# EAGLE board 2-28-13 x1 (EAGLE 6.3), part 1 of 2
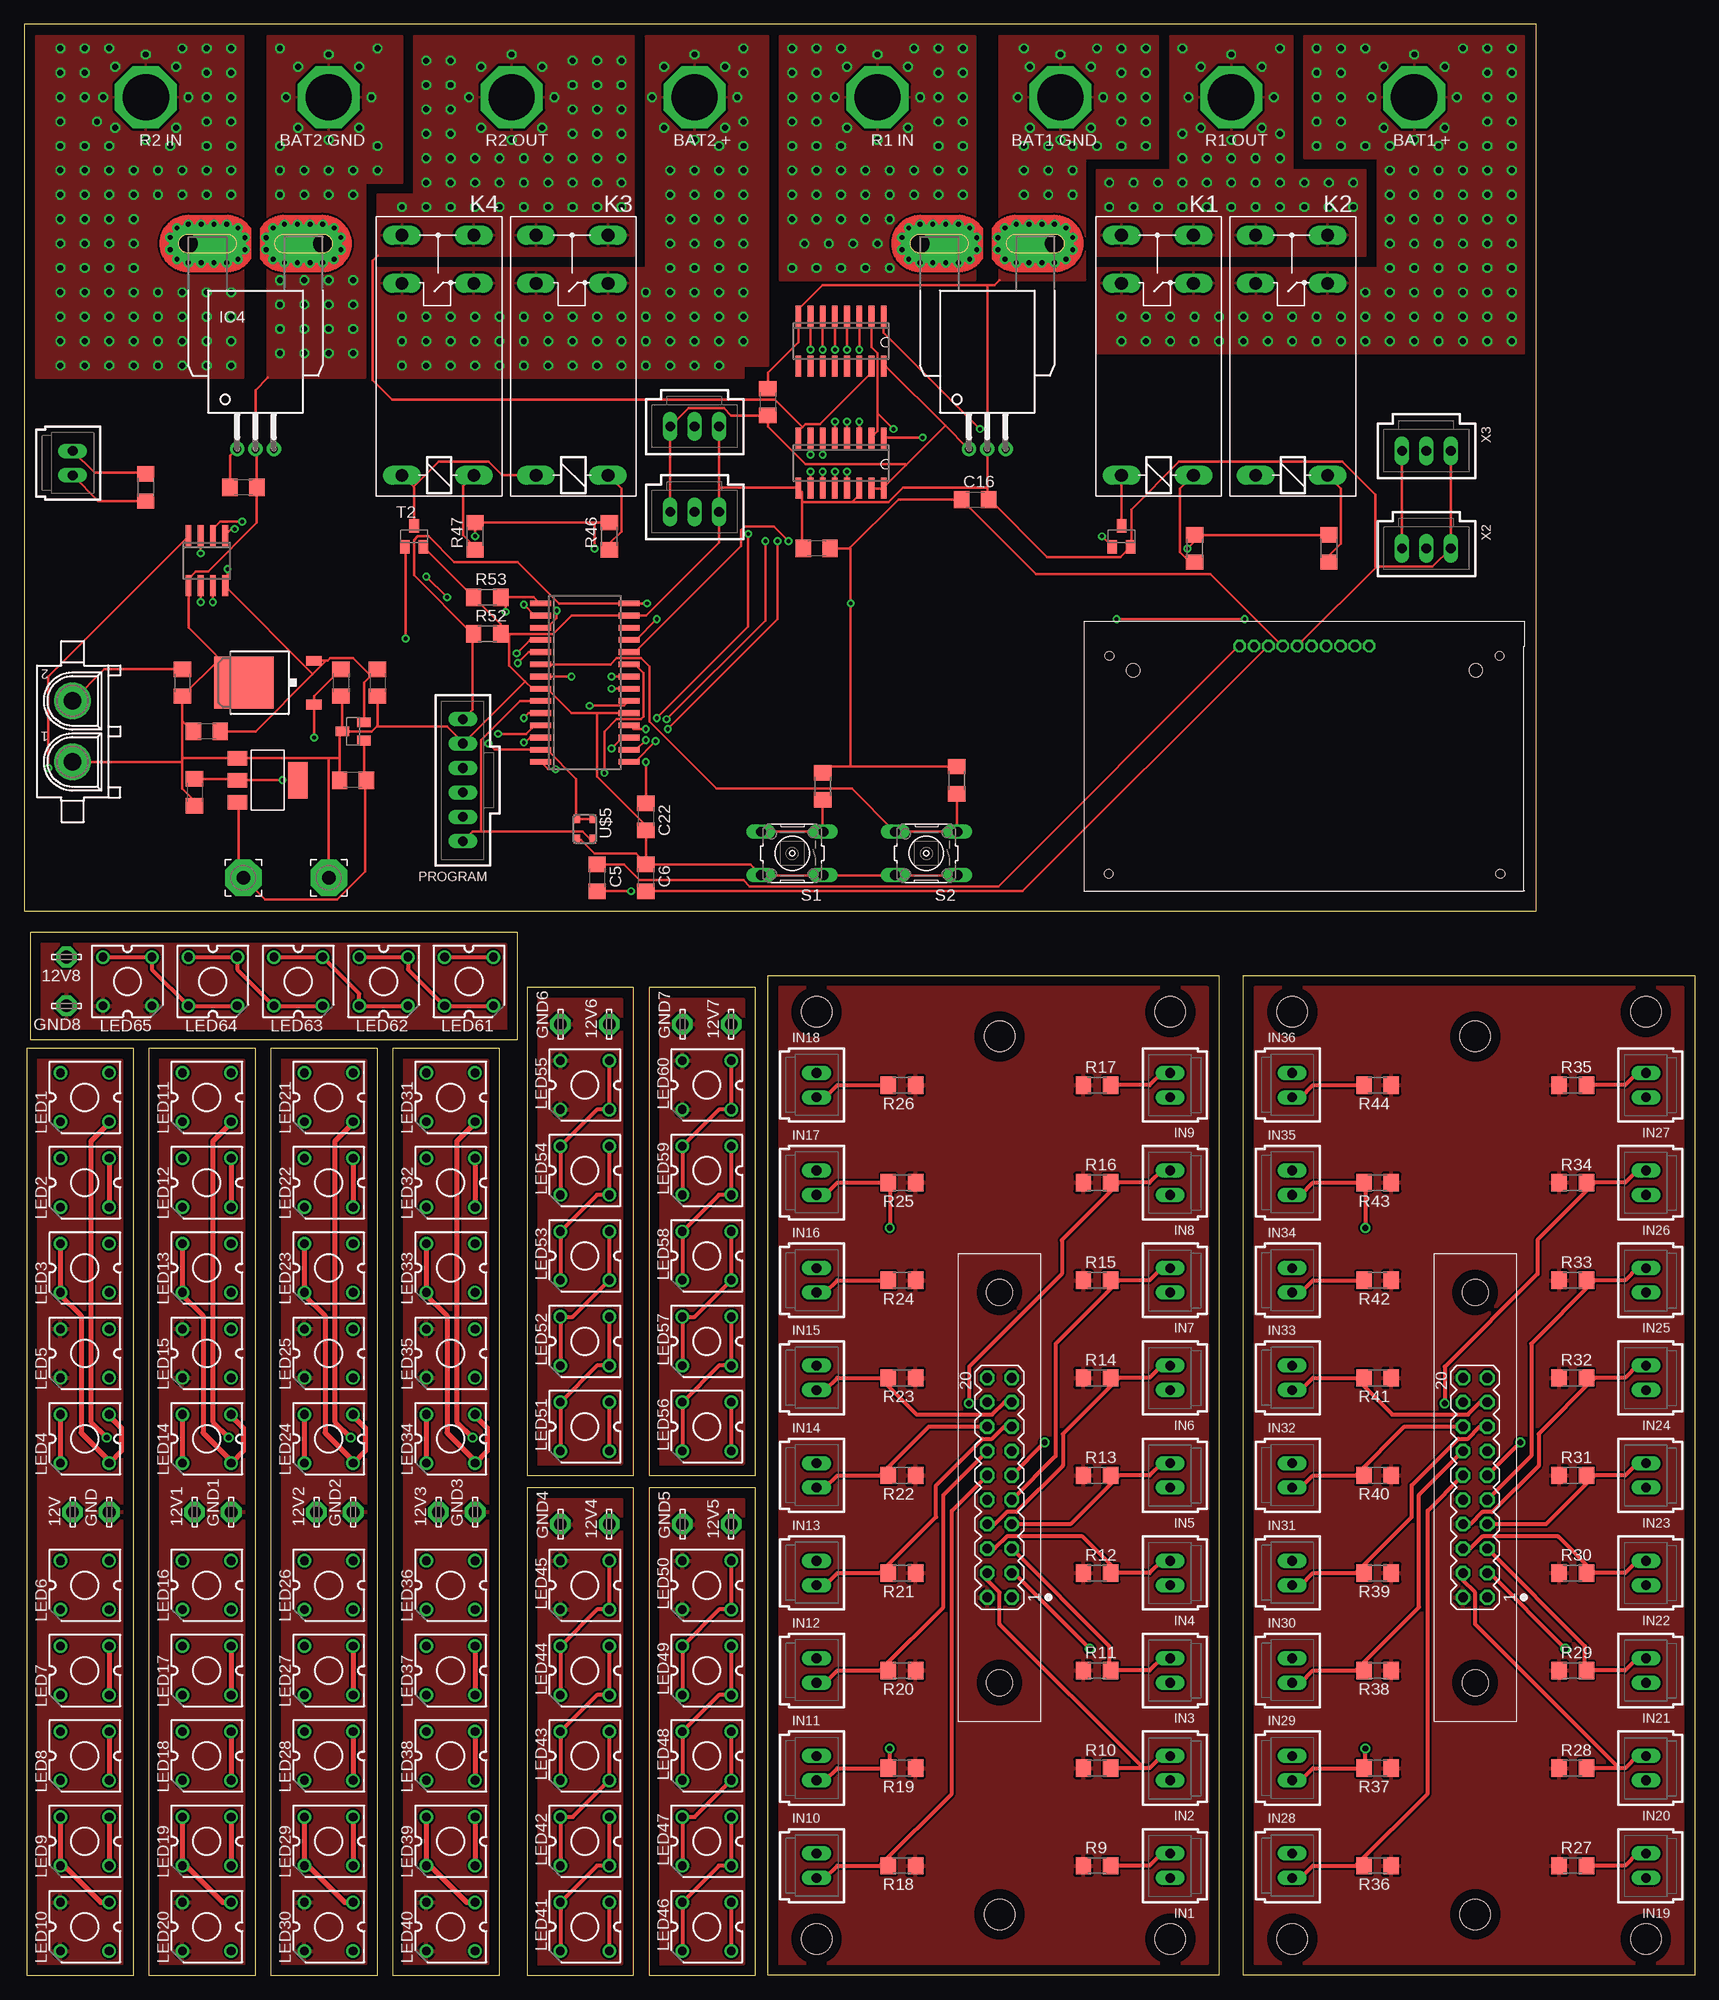
[diagram p0: board, top side]
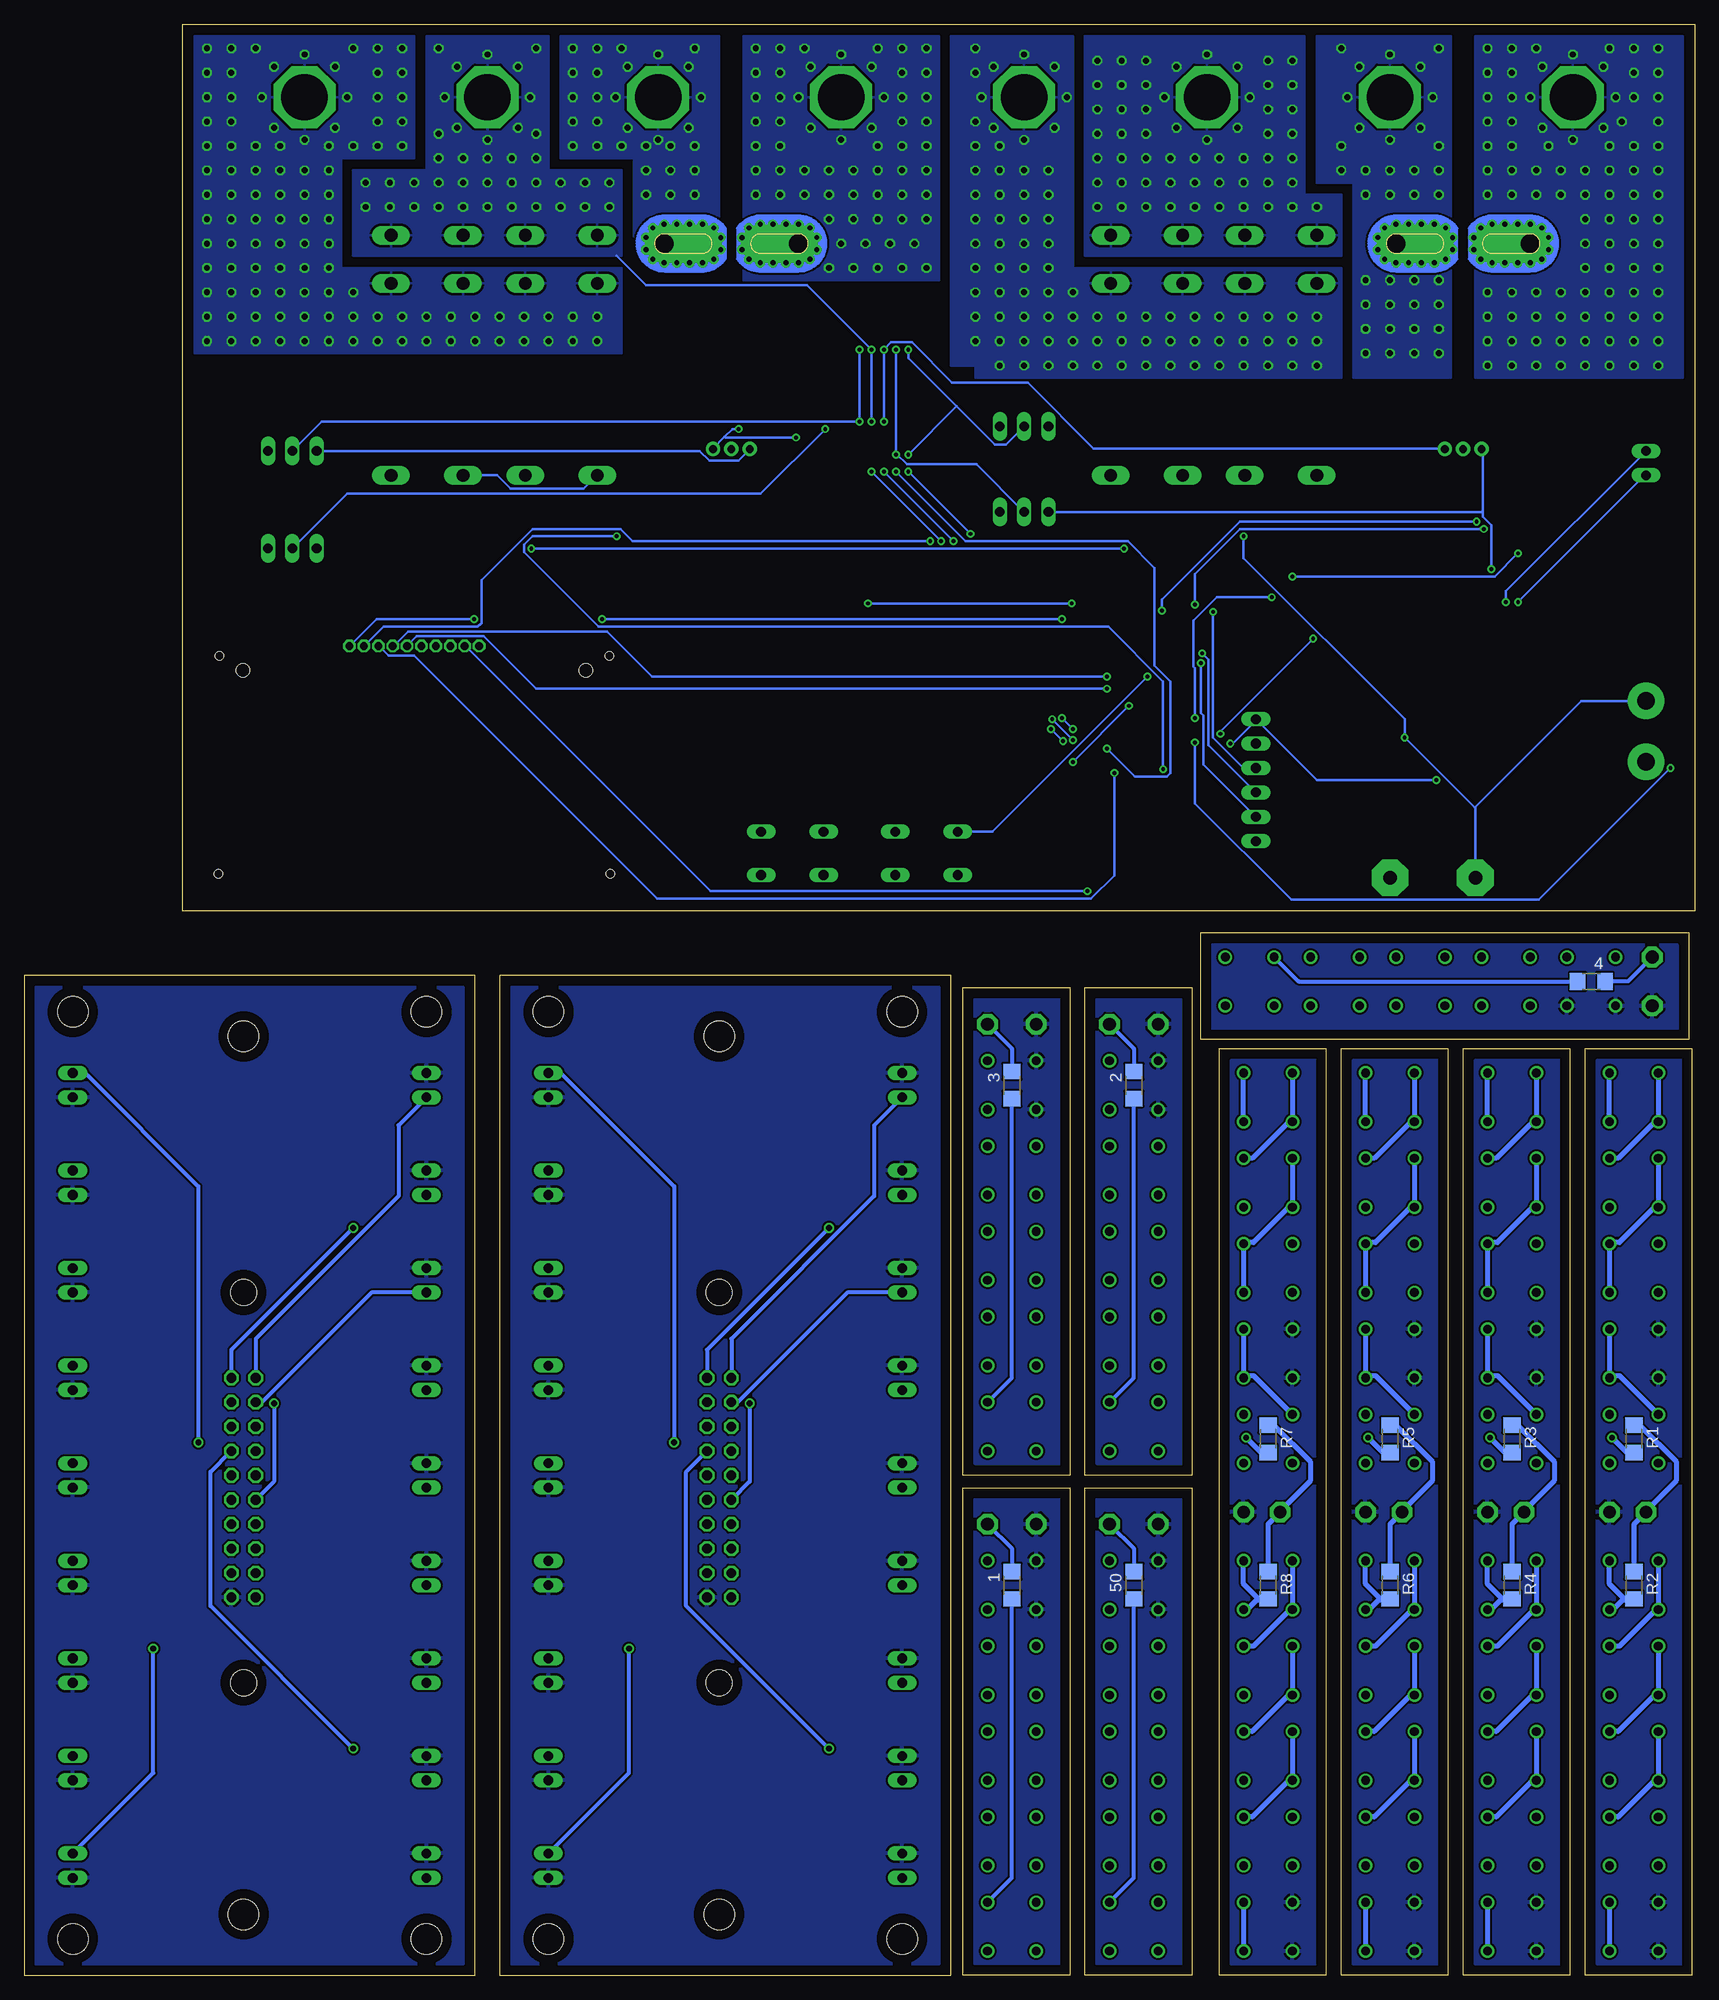
[diagram p1: board, bottom side, seen from below]

Size 173.97 x 203.2 mm. Coordinates in mm from the lower left corner, seen from the top.
Outline: 11.41,0 11.41,96.5 0.31,96.5 0.31,0 11.41,0
Outline: 24.11,0 24.11,96.5 13.01,96.5 13.01,0 24.11,0
Outline: 36.81,0 36.81,96.5 25.71,96.5 25.71,0 36.81,0
Outline: 49.51,0 49.51,96.5 38.41,96.5 38.41,0 49.51,0
Outline: 63.48,0 63.48,50.78 52.38,50.78 52.38,0 63.48,0
Outline: 76.18,0 76.18,50.78 65.08,50.78 65.08,0 76.18,0
Outline: 63.48,52.07 63.48,102.85 52.38,102.85 52.38,52.07 63.48,52.07
Outline: 76.18,52.07 76.18,102.85 65.08,102.85 65.08,52.07 76.18,52.07
Outline: 51.41,108.58 0.64,108.58 0.64,97.48 51.41,97.48 51.41,108.58
Outline: 124.44,104.14 124.44,0 77.45,0 77.45,104.14 124.44,104.14
Outline: 173.97,104.14 173.97,0 126.98,0 126.98,104.14 173.97,104.14
Outline: 157.46,203.2 0,203.2 0,110.82 157.46,110.82 157.46,203.2
Copper layers (1*16): Top 0.035mm / dielectric 1.5mm / Bottom 0.035mm
Design rules "default": minimum track width 10mil, minimum drill 24mil, track to track 8mil, track to pad 8mil, pad to pad 8mil, via to via 8mil, smd to smd 8mil, copper to edge 40mil, drill to drill 8mil, minimum pad ring 10mil, minimum via ring 8mil, stop-mask expansion 4mil, vias tented up to drill 0mil, thermal gap 10mil
Holes 3.17 mm at 119.36,100.33 82.53,100.33 119.36,3.81 82.53,3.81 101.58,6.35 101.58,97.79 168.89,100.33 132.06,100.33 168.89,3.81 132.06,3.81 151.11,6.35 151.11,97.79

## Footprints (pad centres in the part's own frame; a part is rotated, then mirrored left to right if it is on the bottom)
R1206 = smd 1.6 x 1.803: 1 -1.422,0; 2 1.422,0
LSP13 = drill 1.321 pad 2.159 octagon: MP 0,0
SOLDERPAD = drill 4.826 pad 6.452 octagon: P$1 0,0
C1206 = smd 1.6 x 1.8: 1 -1.4,0; 2 1.4,0
TO252 = smd 1 x 1.6: 1 -2.28,-4.8; 2 2.28,-4.8 | smd 5.4 x 6.2: 3 0,2.5
CB-PFF = drill 0.8 pad 1.5: 1 -1.91,-21.4; 2 0,-21.4; 3 1.91,-21.4 | drill 2 pad 4 offset: IP+ 7,0; IP- -7,0 | drill 0.5 pad 0.9: IP+@2 8.89,0.635; IP+@3 8.89,-0.635; IP+@4 8.175,-1.625; IP+@5 7,-2; IP+@6 5.675,-2; IP+@7 4.35,-2; IP+@8 3,-2; IP+@9 1.825,-1.625; IP+@10 1.1,-0.625; IP+@11 1.1,0.625; IP+@12 1.825,1.625; IP+@13 3,2; IP+@14 4.35,2; IP+@15 5.675,2; IP+@16 7,2; IP+@17 8.175,1.625; IP-@2 -8.89,0.635; IP-@3 -8.89,-0.635; IP-@4 -8.175,-1.625; IP-@5 -7,-2; IP-@6 -5.675,-2; IP-@7 -4.325,-2; IP-@8 -3,-2; IP-@9 -1.825,-1.625; IP-@10 -1.1,-0.625; IP-@11 -1.1,0.625; IP-@12 -1.825,1.625; IP-@13 -3,2; IP-@14 -4.325,2; IP-@15 -5.675,2; IP-@16 -7,2; IP-@17 -8.175,1.625
SOT223 = smd 1.499 x 2.007: 1 -2.261,-3.15; 2 0.025,-3.15; 3 2.311,-3.15 | smd 3.81 x 2.007: 4 0,3.15
70543-02 = drill 1.016 long: 1 -1.27,0; 2 1.27,0
350428-1 = drill 1.8 pad 3.81: 1 -3.175,0; 2 3.175,0
G2REA = drill 1.321 long: 1 -2.54,-3.683; 2 -2.54,3.81; P 17.45,-3.683; P@ 17.45,3.81; S 22.454,-3.683; S@ 22.454,3.81
CP41B = drill 0.9 pad 1.27: 1 -2.54,2.54; 2 -2.54,-2.54; 3 2.54,-2.54; 4 2.54,2.54
3,81/1,4 = drill 1.397 pad 3.81 octagon: 1 0,0
70543-06 = drill 1.016 long: 1 -6.35,0; 2 -3.81,0; 3 -1.27,0; 4 1.27,0; 5 3.81,0; 6 6.35,0
B3F-10XX = drill 1.016 long: 1 -3.251,2.261; 2 3.251,2.261; 3 -3.251,-2.261; 4 3.251,-2.261
SOT23 = smd 1 x 1.4: 1 -0.95,-1.1; 2 0.95,-1.1; 3 0,1.1
MA10-2 = drill 1.016 octagon: 1 -11.43,-1.27; 2 -11.43,1.27; 3 -8.89,-1.27; 4 -8.89,1.27; 5 -6.35,-1.27; 6 -6.35,1.27; 7 -3.81,-1.27; 8 -3.81,1.27; 9 -1.27,-1.27; 10 -1.27,1.27; 11 1.27,-1.27; 12 1.27,1.27; 13 3.81,-1.27; 14 3.81,1.27; 15 6.35,-1.27; 16 6.35,1.27; 17 8.89,-1.27; 18 8.89,1.27; 19 11.43,-1.27; 20 11.43,1.27 | hole 2.692: -20.32,0; 20.32,0
SO16 = smd 0.6 x 2.2: 1 -4.445,-2.6; 2 -3.175,-2.6; 3 -1.905,-2.6; 4 -0.635,-2.6; 5 0.635,-2.6; 6 1.905,-2.6; 7 3.175,-2.6; 8 4.445,-2.6; 9 4.445,2.6; 10 3.175,2.6; 11 1.905,2.6; 12 0.635,2.6; 13 -0.635,2.6; 14 -1.905,2.6; 15 -3.175,2.6; 16 -4.445,2.6
SO28W = smd 0.6 x 2.2: 1 -8.255,-4.6; 2 -6.985,-4.6; 3 -5.715,-4.6; 4 -4.445,-4.6; 5 -3.175,-4.6; 6 -1.905,-4.6; 7 -0.635,-4.6; 8 0.635,-4.6; 9 1.905,-4.6; 10 3.175,-4.6; 11 4.445,-4.6; 12 5.715,-4.6; 13 6.985,-4.6; 14 8.255,-4.6; 15 8.255,4.6; 16 6.985,4.6; 17 5.715,4.6; 18 4.445,4.6; 19 3.175,4.6; 20 1.905,4.6; 21 0.635,4.6; 22 -0.635,4.6; 23 -1.905,4.6; 24 -3.175,4.6; 25 -4.445,4.6; 26 -5.715,4.6; 27 -6.985,4.6; 28 -8.255,4.6
ASE = smd 0.9 x 0.65: 1 -1.05,-0.825; 2 1.05,-0.825; 3 1.05,0.825; 4 -1.05,0.825
LCD_SCREEN = drill 0.8 octagon: 1 -6.75,0; 2 -5.25,0; 3 -3.75,0; 4 -2.25,0; 5 -0.75,0; 6 0.75,0; 7 2.25,0; 8 3.75,0; 9 5.25,0; 10 6.75,0 | hole 0.9: 20.3,1; -20.3,1; 20.4,23.7; -20.4,23.7 | hole 1.4: 17.85,2.55; -17.85,2.55
SO-08 = smd 0.6 x 2.2: 1 -1.905,-2.6; 2 -0.635,-2.6; 3 0.635,-2.6; 4 1.905,-2.6; 5 1.905,2.6; 6 0.635,2.6; 7 -0.635,2.6; 8 -1.905,2.6
70543-03 = drill 1.016 long: 1 -2.54,0; 2 0,0; 3 2.54,0

## Placement (x,y rotation side)
1  RESISTORSMD1206  [R1206]  71.1,40.64 270 bottom
2  RESISTORSMD1206  [R1206]  58.4,92.71 270 bottom
3  RESISTORSMD1206  [R1206]  71.1,92.71 270 bottom
4  RESISTORSMD1206  [R1206]  10.78,103.5 180 bottom
12V  LSP13  [LSP13]  5.06,48.26 90 top
12V1  LSP13  [LSP13]  17.76,48.26 90 top
12V2  LSP13  [LSP13]  30.46,48.26 90 top
12V3  LSP13  [LSP13]  43.16,48.26 90 top
12V4  LSP13  [LSP13]  60.94,46.99 90 top
12V5  LSP13  [LSP13]  73.64,46.99 90 top
12V6  LSP13  [LSP13]  60.94,99.06 90 top
12V7  LSP13  [LSP13]  73.64,99.06 90 top
12V8  LSP13  [LSP13]  4.43,106.05 180 top
50  RESISTORSMD1206  [R1206]  58.4,40.64 270 bottom
BAT+_1  BAT1 +  [SOLDERPAD]  144.76,195.58 180 top
BAT+_2  BAT2 +  [SOLDERPAD]  69.83,195.58 180 top
BAT-_1  BAT1 GND  [SOLDERPAD]  107.93,195.58 180 top
BAT-_2  BAT2 GND  [SOLDERPAD]  31.73,195.58 180 top
C1  .3uF  [C1206]  34.27,124.46 180 top
C2  1uF  [C1206]  33,134.62 270 top
C3  1uF  [C1206]  22.84,154.94 180 top
C4  1uF  [C1206]  36.81,134.62 270 top
C5  1uF  [C1206]  59.67,114.3 270 top
C6  1uF  [C1206]  64.75,114.3 270 top
C7  1uF  [C1206]  19.03,129.54 180 top
C8  1uF  [C1206]  16.49,134.62 270 top
C9  1uF  [C1206]  17.76,123.19 270 top
C10  1uF  [C1206]  77.45,163.83 270 top
C16  .1uF  [C1206]  99.04,153.67 0 top
C22  1uF  [C1206]  64.75,120.65 270 top
C48  .1uF  [C1206]  82.53,148.59 180 top
GND  LSP13  [LSP13]  8.87,48.26 90 top
GND1  LSP13  [LSP13]  21.57,48.26 90 top
GND2  LSP13  [LSP13]  34.27,48.26 90 top
GND3  LSP13  [LSP13]  46.97,48.26 90 top
GND4  LSP13  [LSP13]  55.86,46.99 90 top
GND5  LSP13  [LSP13]  68.56,46.99 90 top
GND6  LSP13  [LSP13]  55.86,99.06 90 top
GND7  LSP13  [LSP13]  68.56,99.06 90 top
GND8  LSP13  [LSP13]  4.43,100.97 180 top
IC1  7805DT  [TO252]  25.38,134.62 90 top
IC2  ACS758ECB-200B-PFF-T  [CB-PFF]  100.31,180.34 0 top
IC3  REG1117  [SOT223]  25.38,124.46 270 top
IC4  ACS758ECB-200B-PFF-T  [CB-PFF]  24.11,180.34 0 top
IN1  C-GRID-02-70543  [70543-02]  119.36,11.43 90 top
IN2  C-GRID-02-70543  [70543-02]  119.36,21.59 90 top
IN3  C-GRID-02-70543  [70543-02]  119.36,31.75 90 top
IN4  C-GRID-02-70543  [70543-02]  119.36,41.91 90 top
IN5  C-GRID-02-70543  [70543-02]  119.36,52.07 90 top
IN6  C-GRID-02-70543  [70543-02]  119.36,62.23 90 top
IN7  C-GRID-02-70543  [70543-02]  119.36,72.39 90 top
IN8  C-GRID-02-70543  [70543-02]  119.36,82.55 90 top
IN9  C-GRID-02-70543  [70543-02]  119.36,92.71 90 top
IN10  C-GRID-02-70543  [70543-02]  82.53,11.43 270 top
IN11  C-GRID-02-70543  [70543-02]  82.53,21.59 270 top
IN12  C-GRID-02-70543  [70543-02]  82.53,31.75 270 top
IN13  C-GRID-02-70543  [70543-02]  82.53,41.91 270 top
IN14  C-GRID-02-70543  [70543-02]  82.53,52.07 270 top
IN15  C-GRID-02-70543  [70543-02]  82.53,62.23 270 top
IN16  C-GRID-02-70543  [70543-02]  82.53,72.39 270 top
IN17  C-GRID-02-70543  [70543-02]  82.53,82.55 270 top
IN18  C-GRID-02-70543  [70543-02]  82.53,92.71 270 top
IN19  C-GRID-02-70543  [70543-02]  168.89,11.43 90 top
IN20  C-GRID-02-70543  [70543-02]  168.89,21.59 90 top
IN21  C-GRID-02-70543  [70543-02]  168.89,31.75 90 top
IN22  C-GRID-02-70543  [70543-02]  168.89,41.91 90 top
IN23  C-GRID-02-70543  [70543-02]  168.89,52.07 90 top
IN24  C-GRID-02-70543  [70543-02]  168.89,62.23 90 top
IN25  C-GRID-02-70543  [70543-02]  168.89,72.39 90 top
IN26  C-GRID-02-70543  [70543-02]  168.89,82.55 90 top
IN27  C-GRID-02-70543  [70543-02]  168.89,92.71 90 top
IN28  C-GRID-02-70543  [70543-02]  132.06,11.43 270 top
IN29  C-GRID-02-70543  [70543-02]  132.06,21.59 270 top
IN30  C-GRID-02-70543  [70543-02]  132.06,31.75 270 top
IN31  C-GRID-02-70543  [70543-02]  132.06,41.91 270 top
IN32  C-GRID-02-70543  [70543-02]  132.06,52.07 270 top
IN33  C-GRID-02-70543  [70543-02]  132.06,62.23 270 top
IN34  C-GRID-02-70543  [70543-02]  132.06,72.39 270 top
IN35  C-GRID-02-70543  [70543-02]  132.06,82.55 270 top
IN36  C-GRID-02-70543  [70543-02]  132.06,92.71 270 top
J1  350428-1  [350428-1]  5.06,129.54 90 top
K1  G2REA  [G2REA]  118.09,158.75 90 top
K2  G2REA  [G2REA]  132.06,158.75 90 top
K3  G2REA  [G2REA]  57.13,158.75 90 top
K4  G2REA  [G2REA]  43.16,158.75 90 top
LED1  LED1  [CP41B]  6.33,91.44 90 top
LED2  LED2  [CP41B]  6.33,82.55 90 top
LED3  LED3  [CP41B]  6.33,73.66 90 top
LED4  LED4  [CP41B]  6.33,55.88 90 top
LED5  LED5  [CP41B]  6.33,64.77 90 top
LED6  LED6  [CP41B]  6.33,40.64 90 top
LED7  LED7  [CP41B]  6.33,31.75 90 top
LED8  LED8  [CP41B]  6.33,22.86 90 top
LED9  LED9  [CP41B]  6.33,13.97 90 top
LED10  LED10  [CP41B]  6.33,5.08 90 top
LED11  LED1  [CP41B]  19.03,91.44 90 top
LED12  LED2  [CP41B]  19.03,82.55 90 top
LED13  LED3  [CP41B]  19.03,73.66 90 top
LED14  LED4  [CP41B]  19.03,55.88 90 top
LED15  LED5  [CP41B]  19.03,64.77 90 top
LED16  LED6  [CP41B]  19.03,40.64 90 top
LED17  LED7  [CP41B]  19.03,31.75 90 top
LED18  LED8  [CP41B]  19.03,22.86 90 top
LED19  LED9  [CP41B]  19.03,13.97 90 top
LED20  LED10  [CP41B]  19.03,5.08 90 top
LED21  LED1  [CP41B]  31.73,91.44 90 top
LED22  LED2  [CP41B]  31.73,82.55 90 top
LED23  LED3  [CP41B]  31.73,73.66 90 top
LED24  LED4  [CP41B]  31.73,55.88 90 top
LED25  LED5  [CP41B]  31.73,64.77 90 top
LED26  LED6  [CP41B]  31.73,40.64 90 top
LED27  LED7  [CP41B]  31.73,31.75 90 top
LED28  LED8  [CP41B]  31.73,22.86 90 top
LED29  LED9  [CP41B]  31.73,13.97 90 top
LED30  LED10  [CP41B]  31.73,5.08 90 top
LED31  LED1  [CP41B]  44.43,91.44 90 top
LED32  LED2  [CP41B]  44.43,82.55 90 top
LED33  LED3  [CP41B]  44.43,73.66 90 top
LED34  LED4  [CP41B]  44.43,55.88 90 top
LED35  LED5  [CP41B]  44.43,64.77 90 top
LED36  LED6  [CP41B]  44.43,40.64 90 top
LED37  LED7  [CP41B]  44.43,31.75 90 top
LED38  LED8  [CP41B]  44.43,22.86 90 top
LED39  LED9  [CP41B]  44.43,13.97 90 top
LED40  LED10  [CP41B]  44.43,5.08 90 top
LED41  LED1  [CP41B]  58.4,5.08 90 top
LED42  LED2  [CP41B]  58.4,13.97 90 top
LED43  LED3  [CP41B]  58.4,22.86 90 top
LED44  LED4  [CP41B]  58.4,31.75 90 top
LED45  LED5  [CP41B]  58.4,40.64 90 top
LED46  LED1  [CP41B]  71.1,5.08 90 top
LED47  LED2  [CP41B]  71.1,13.97 90 top
LED48  LED3  [CP41B]  71.1,22.86 90 top
LED49  LED4  [CP41B]  71.1,31.75 90 top
LED50  LED5  [CP41B]  71.1,40.64 90 top
LED51  LED1  [CP41B]  58.4,57.15 90 top
LED52  LED2  [CP41B]  58.4,66.04 90 top
LED53  LED3  [CP41B]  58.4,74.93 90 top
LED54  LED4  [CP41B]  58.4,83.82 90 top
LED55  LED5  [CP41B]  58.4,92.71 90 top
LED56  LED1  [CP41B]  71.1,57.15 90 top
LED57  LED2  [CP41B]  71.1,66.04 90 top
LED58  LED3  [CP41B]  71.1,74.93 90 top
LED59  LED4  [CP41B]  71.1,83.82 90 top
LED60  LED5  [CP41B]  71.1,92.71 90 top
LED61  LED1  [CP41B]  46.33,103.5 180 top
LED62  LED2  [CP41B]  37.45,103.5 180 top
LED63  LED3  [CP41B]  28.55,103.5 180 top
LED64  LED4  [CP41B]  19.66,103.5 180 top
LED65  LED5  [CP41B]  10.78,103.5 180 top
PAD_12V  12v  [3,81/1,4]  22.84,114.3 0 top
PAD_GND  gnd  [3,81/1,4]  31.73,114.3 0 top
PROGRAM  C-GRID-06-70543  [70543-06]  45.7,124.46 90 top
R1  50  [R1206]  6.33,55.88 270 bottom
R2  50  [R1206]  6.33,40.64 270 bottom
R3  50  [R1206]  19.03,55.88 270 bottom
R4  50  [R1206]  19.03,40.64 270 bottom
R5  50  [R1206]  31.73,55.88 270 bottom
R6  50  [R1206]  31.73,40.64 270 bottom
R7  50  [R1206]  44.43,55.88 270 bottom
R8  50  [R1206]  44.43,40.64 270 bottom
R9  1K  [R1206]  111.74,11.43 0 top
R10  1K  [R1206]  111.74,21.59 0 top
R11  1K  [R1206]  111.74,31.75 0 top
R12  1K  [R1206]  111.74,41.91 0 top
R13  1K  [R1206]  111.74,52.07 0 top
R14  1K  [R1206]  111.74,62.23 0 top
R15  1K  [R1206]  111.74,72.39 0 top
R16  1K  [R1206]  111.74,82.55 0 top
R17  1K  [R1206]  111.74,92.71 0 top
R18  1K  [R1206]  91.42,11.43 180 top
R19  1K  [R1206]  91.42,21.59 180 top
R20  1K  [R1206]  91.42,31.75 180 top
R21  1K  [R1206]  91.42,41.91 180 top
R22  1K  [R1206]  91.42,52.07 180 top
R23  1K  [R1206]  91.42,62.23 180 top
R24  1K  [R1206]  91.42,72.39 180 top
R25  1K  [R1206]  91.42,82.55 180 top
R26  1K  [R1206]  91.42,92.71 180 top
R27  1K  [R1206]  161.27,11.43 0 top
R28  1K  [R1206]  161.27,21.59 0 top
R29  1K  [R1206]  161.27,31.75 0 top
R30  1K  [R1206]  161.27,41.91 0 top
R31  1K  [R1206]  161.27,52.07 0 top
R32  1K  [R1206]  161.27,62.23 0 top
R33  1K  [R1206]  161.27,72.39 0 top
R34  1K  [R1206]  161.27,82.55 0 top
R35  1K  [R1206]  161.27,92.71 0 top
R36  1K  [R1206]  140.95,11.43 180 top
R37  1K  [R1206]  140.95,21.59 180 top
R38  1K  [R1206]  140.95,31.75 180 top
R39  1K  [R1206]  140.95,41.91 180 top
R40  1K  [R1206]  140.95,52.07 180 top
R41  1K  [R1206]  140.95,62.23 180 top
R42  1K  [R1206]  140.95,72.39 180 top
R43  1K  [R1206]  140.95,82.55 180 top
R44  1K  [R1206]  140.95,92.71 180 top
R45  1K  [R1206]  135.87,148.59 90 top
R46  1K  [R1206]  60.94,149.86 90 top
R47  1K  [R1206]  46.97,149.86 90 top
R48  1K  [R1206]  83.17,123.83 90 top
R49  1K  [R1206]  97.14,124.46 270 top
R50  120  [R1206]  12.68,154.94 90 top
R52  10k\  [R1206]  48.24,139.7 0 top
R53  470  [R1206]  48.24,143.51 0 top
R169  1K  [R1206]  121.9,148.59 90 top
R_IN_1  R1 IN  [SOLDERPAD]  88.88,195.58 180 top
R_IN_2  R2 IN  [SOLDERPAD]  12.68,195.58 180 top
R_OUT_1  R1 OUT  [SOLDERPAD]  125.71,195.58 180 top
R_OUT_2  R2 OUT  [SOLDERPAD]  50.78,195.58 180 top
S1  [B3F-10XX]  79.99,116.84 180 top
S2  [B3F-10XX]  93.96,116.84 180 top
T1  PMV56XN  [SOT23]  114.28,149.86 0 top
T2  PMV56XN  [SOT23]  40.62,149.86 0 top
U$1  AMP_LATCH-20  [MA10-2]  101.58,50.8 90 top
U$2  AMP_LATCH-20  [MA10-2]  151.11,50.8 90 top
U$3  MCP-3008  [SO16]  85.07,157.48 180 top
U$4  PIC24HJ128GP-202  [SO28W]  58.4,134.62 270 top
U$5  ASE  [ASE]  58.4,119.38 270 top
U$6  LCD_SCREEN  [LCD_SCREEN]  133.33,138.43 180 top
U$7  MAX6105  [SOT23]  34.27,129.54 90 top
U$8  SP720APP  [SO16]  85.07,170.18 180 top
U$9  MAX3440E  [SO-08]  19.03,147.32 180 top
X1  BAT2 TEMP 1  [70543-03]  69.83,152.4 180 top
X2  BAT1 TEMP1  [70543-03]  146.03,148.59 180 top
X3  BAT1 TEMP2  [70543-03]  146.03,158.75 180 top
X4  BAT2 TEMP2  [70543-03]  69.83,161.29 180 top
X5  rs-485  [70543-02]  5.06,157.48 270 top

## Library data of the parts
1-4 50 BAT+_1 BAT+_2 BAT-_1 BAT-_2 R_IN_1 R_IN_2 R_OUT_1 R_OUT_2 U$3 U$7 U$8 = SolarJackets_Common
12V 12V1-12V8 GND GND1-GND8 = solpad
C1-C10 C16 C22 C48 R1-R50 R52 R53 R169 = rcl
IC1 = linear
IC2 IC4 = allegro; MPN: ACS758ECB-200B-PFF-T; OC_FARNELL: 1718993; OC_NEWARK: 04R7127
IC3 = burr-brown; MPN: REG1117; OC_FARNELL: 1097566; OC_NEWARK: 14P6981
IN1-IN36 PROGRAM X1-X5 = con-molex; OC_FARNELL: unknown; OC_NEWARK: unknown
J1 = con-amp
K1-K4 = relay; OC_FARNELL: unknown; OC_NEWARK: unknown
LED1-LED65 = led
PAD_12V PAD_GND = wirepad
S1 S2 = switch-omron; MPN: B3F-1000; OC_FARNELL: 176432; OC_NEWARK: 36M3542
T1 T2 = SolarJacketsADC; PART_NUM: PMV56XN,215
U$1 U$2 = SolarJackets_Common; PART_NUM: 5499160-1
U$4 = LTC6803
U$5 = crystal; OC_FARNELL: unknown; OC_NEWARK: unknown
U$6 = LCD_SCREEN
U$9 = SolarJackets

## Nets
3.3V: IN1.1 IN2.1 IN3.1 IN4.1 IN5.1 IN6.1 IN7.1 IN8.1 IN9.1 IN10.1 IN11.1 IN12.1 IN13.1 IN14.1 IN15.1 IN16.1 IN17.1 IN18.1 U$1.1
3.3V1: IN19.1 IN20.1 IN21.1 IN22.1 IN23.1 IN24.1 IN25.1 IN26.1 IN27.1 IN28.1 IN29.1 IN30.1 IN31.1 IN32.1 IN33.1 IN34.1 IN35.1 IN36.1 U$2.1
+3V3: C9.1 C16.1 C48.1 IC3.2 PROGRAM.6 R48.2 R49.1 R52.1 U$4.13 U$4.28 U$5.1 U$5.4 U$6.7
+5V: C3.2 C4.1 C7.1 C10.2 IC1.2 IC2.1 IC4.1 U$3.15 U$3.16 U$7.2 U$8.16 U$9.8 X1.3 X2.3 X3.3 X4.3
+12V: C1.1 C2.1 C8.1 IC1.1 IC3.3 J1.2 PAD_12V.1 R45.2 R46.2 R47.2 R169.2 U$7.1
CH0: IC2.3 U$3.1 U$8.1
CH1: U$3.2 U$8.2 X2.2
CH2: U$3.3 U$8.3 X3.2
CH3: K1.S K1.S@ K2.S K2.S@ R_OUT_1.P$1 U$3.4 U$8.4
CH4: IC4.3 U$3.5 U$8.5
CH5: U$3.6 U$8.6 X1.2
CH6: U$3.7 U$8.7 X4.2
CH7: K3.S K3.S@ K4.S K4.S@ R_OUT_2.P$1 U$3.8 U$8.15
GND: GND.MP LED5.1 LED5.4 LED10.1 LED10.4
GND1: GND1.MP LED15.1 LED15.4 LED20.1 LED20.4
GND2: GND2.MP LED25.1 LED25.4 LED30.1 LED30.4
GND3: GND3.MP LED35.1 LED35.4 LED40.1 LED40.4
GND4: GND4.MP LED45.1 LED45.4
GND5: GND5.MP LED50.1 LED50.4
GND6: GND6.MP LED55.1 LED55.4
GND7: GND7.MP LED60.1 LED60.4
GND8: GND8.MP LED65.1 LED65.4
GND9: R9.1 R10.1 R11.1 R12.1 R13.1 R14.1 R15.1 R16.1 R17.1 R18.1 R19.1 R20.1 R21.1 R22.1 R23.1 R24.1 R25.1 R26.1 U$1.2
GND10: R27.1 R28.1 R29.1 R30.1 R31.1 R32.1 R33.1 R34.1 R35.1 R36.1 R37.1 R38.1 R39.1 R40.1 R41.1 R42.1 R43.1 R44.1 U$2.2
GND11: BAT-_1.P$1 BAT-_2.P$1 C1.2 C2.2 C3.1 C4.2 C6.1 C7.2 C8.2 C9.2 C10.1 C16.2 C22.2 C48.2 IC1.3 IC2.2 IC2.IP+ IC2.IP+@2 IC2.IP+@3 IC2.IP+@4 IC2.IP+@5 IC2.IP+@6 IC2.IP+@7 IC2.IP+@8 IC2.IP+@9 IC2.IP+@10 IC2.IP+@11 IC2.IP+@12 IC2.IP+@13 IC2.IP+@14 IC2.IP+@15 IC2.IP+@16 IC2.IP+@17 IC3.1 IC4.2 IC4.IP+ IC4.IP+@2 IC4.IP+@3 IC4.IP+@4 IC4.IP+@5 IC4.IP+@6 IC4.IP+@7 IC4.IP+@8 IC4.IP+@9 IC4.IP+@10 IC4.IP+@11 IC4.IP+@12 IC4.IP+@13 IC4.IP+@14 IC4.IP+@15 IC4.IP+@16 IC4.IP+@17 J1.1 PAD_GND.1 PROGRAM.5 R52.2 R53.1 S1.1 S1.2 S2.1 S2.2 T1.2 T2.2 U$3.9 U$3.14 U$4.8 U$4.19 U$4.27 U$5.2 U$6.6 U$7.3 U$8.8 U$9.5 X1.1 X2.1 X3.1 X4.1
IN1: IN1.2 R9.2 U$1.3
IN2: IN2.2 R10.2 U$1.4
IN3: IN3.2 R11.2 U$1.5
IN4: IN4.2 R12.2 U$1.6
IN5: IN5.2 R13.2 U$1.7
IN6: IN6.2 R14.2 U$1.8
IN7: IN7.2 R15.2 U$1.9
IN8: IN8.2 R16.2 U$1.10
IN9: IN9.2 R17.2 U$1.11
IN10: IN10.2 R18.2 U$1.12
IN11: IN11.2 R19.2 U$1.13
IN12: IN12.2 R20.2 U$1.14
IN13: IN13.2 R21.2 U$1.15
IN14: IN14.2 R22.2 U$1.16
IN15: IN15.2 R23.2 U$1.17
IN16: IN16.2 R24.2 U$1.18
IN17: IN17.2 R25.2 U$1.19
IN18: IN18.2 R26.2 U$1.20
IN19: IN19.2 R27.2 U$2.3
IN20: IN32.2 R40.2 U$2.16
IN21: IN33.2 R41.2 U$2.17
IN22: IN25.2 R33.2 U$2.9
IN23: IN29.2 R37.2 U$2.13
IN24: IN36.2 R44.2 U$2.20
IN25: IN34.2 R42.2 U$2.18
IN26: IN24.2 R32.2 U$2.8
IN27: IN23.2 R31.2 U$2.7
IN28: IN30.2 R38.2 U$2.14
IN29: IN31.2 R39.2 U$2.15
IN30: IN20.2 R28.2 U$2.4
IN31: IN21.2 R29.2 U$2.5
IN32: IN35.2 R43.2 U$2.19
IN33: IN28.2 R36.2 U$2.12
IN34: IN27.2 R35.2 U$2.11
IN35: IN26.2 R34.2 U$2.10
IN36: IN22.2 R30.2 U$2.6
MCLR: PROGRAM.4 R53.2 U$4.1
N$1: LED1.2 LED1.3 R1.2
N$2: LED1.1 LED1.4 LED2.2 LED2.3
N$3: LED2.1 LED2.4 LED3.2 LED3.3
N$4: LED3.1 LED3.4 LED4.2 LED4.3
N$5: LED4.1 LED4.4 LED5.2 LED5.3
N$6: LED6.2 LED6.3 R2.2
N$7: LED6.1 LED6.4 LED7.2 LED7.3
N$8: LED7.1 LED7.4 LED8.2 LED8.3
N$9: 12V.MP R1.1 R2.1
N$10: LED8.1 LED8.4 LED9.2 LED9.3
N$11: LED9.1 LED9.4 LED10.2 LED10.3
N$12: LED11.2 LED11.3 R3.2
N$13: LED11.1 LED11.4 LED12.2 LED12.3
N$14: LED12.1 LED12.4 LED13.2 LED13.3
N$15: LED13.1 LED13.4 LED14.2 LED14.3
N$16: LED14.1 LED14.4 LED15.2 LED15.3
N$17: 12V1.MP R3.1 R4.1
N$18: LED16.2 LED16.3 R4.2
N$19: LED16.1 LED16.4 LED17.2 LED17.3
N$20: LED17.1 LED17.4 LED18.2 LED18.3
N$21: LED18.1 LED18.4 LED19.2 LED19.3
N$22: LED19.1 LED19.4 LED20.2 LED20.3
N$23: LED21.2 LED21.3 R5.2
N$24: LED21.1 LED21.4 LED22.2 LED22.3
N$25: LED22.1 LED22.4 LED23.2 LED23.3
N$26: LED23.1 LED23.4 LED24.2 LED24.3
N$27: LED24.1 LED24.4 LED25.2 LED25.3
N$28: 12V2.MP R5.1 R6.1
N$29: LED26.2 LED26.3 R6.2
N$30: LED26.1 LED26.4 LED27.2 LED27.3
N$31: LED27.1 LED27.4 LED28.2 LED28.3
N$32: LED28.1 LED28.4 LED29.2 LED29.3
N$33: LED29.1 LED29.4 LED30.2 LED30.3
N$34: LED31.2 LED31.3 R7.2
N$35: LED31.1 LED31.4 LED32.2 LED32.3
N$36: LED32.1 LED32.4 LED33.2 LED33.3
N$37: LED33.1 LED33.4 LED34.2 LED34.3
N$38: LED34.1 LED34.4 LED35.2 LED35.3
N$39: 12V3.MP R7.1 R8.1
N$40: LED36.2 LED36.3 R8.2
N$41: LED36.1 LED36.4 LED37.2 LED37.3
N$42: LED37.1 LED37.4 LED38.2 LED38.3
N$43: LED38.1 LED38.4 LED39.2 LED39.3
N$44: LED39.1 LED39.4 LED40.2 LED40.3
N$45: 50.2 LED41.2 LED41.3
N$46: LED41.1 LED41.4 LED42.2 LED42.3
N$47: LED42.1 LED42.4 LED43.2 LED43.3
N$48: LED43.1 LED43.4 LED44.2 LED44.3
N$49: LED44.1 LED44.4 LED45.2 LED45.3
N$50: 12V4.MP 50.1
N$51: 1.2 LED46.2 LED46.3
N$52: LED46.1 LED46.4 LED47.2 LED47.3
N$53: LED47.1 LED47.4 LED48.2 LED48.3
N$54: LED48.1 LED48.4 LED49.2 LED49.3
N$55: LED49.1 LED49.4 LED50.2 LED50.3
N$56: 1.1 12V5.MP
N$57: 2.2 LED51.2 LED51.3
N$58: LED51.1 LED51.4 LED52.2 LED52.3
N$59: LED52.1 LED52.4 LED53.2 LED53.3
N$60: LED53.1 LED53.4 LED54.2 LED54.3
N$61: LED54.1 LED54.4 LED55.2 LED55.3
N$62: 2.1 12V6.MP
N$63: 3.2 LED56.2 LED56.3
N$64: LED56.1 LED56.4 LED57.2 LED57.3
N$65: LED57.1 LED57.4 LED58.2 LED58.3
N$66: LED58.1 LED58.4 LED59.2 LED59.3
N$67: LED59.1 LED59.4 LED60.2 LED60.3
N$68: 3.1 12V7.MP
N$69: 4.2 LED61.2 LED61.3
N$70: LED61.1 LED61.4 LED62.2 LED62.3
N$71: LED62.1 LED62.4 LED63.2 LED63.3
N$72: LED63.1 LED63.4 LED64.2 LED64.3
N$73: LED64.1 LED64.4 LED65.2 LED65.3
N$74: 4.1 12V8.MP
N$75: C22.1 U$4.20
N$76: IC2.IP- IC2.IP-@2 IC2.IP-@3 IC2.IP-@4 IC2.IP-@5 IC2.IP-@6 IC2.IP-@7 IC2.IP-@8 IC2.IP-@9 IC2.IP-@10 IC2.IP-@11 IC2.IP-@12 IC2.IP-@13 IC2.IP-@14 IC2.IP-@15 IC2.IP-@16 IC2.IP-@17 R_IN_1.P$1
N$77: C6.2 U$6.8
N$78: C5.2 U$6.9
N$79: C5.1 U$6.10
N$80: K1.2 K2.2 T1.3
N$81: K2.1 R45.1
N$82: BAT+_2.P$1 K3.P K3.P@ K4.P K4.P@
N$83: K3.1 R46.1
N$84: K3.2 K4.2 T2.3
N$85: K4.1 R47.1
N$86: IC4.IP- IC4.IP-@2 IC4.IP-@3 IC4.IP-@4 IC4.IP-@5 IC4.IP-@6 IC4.IP-@7 IC4.IP-@8 IC4.IP-@9 IC4.IP-@10 IC4.IP-@11 IC4.IP-@12 IC4.IP-@13 IC4.IP-@14 IC4.IP-@15 IC4.IP-@16 IC4.IP-@17 R_IN_2.P$1
N$172: K1.1 R169.1
N$219: R50.2 U$9.7 X5.1
N$220: R50.1 U$9.6 X5.2
N$278: BAT+_1.P$1 K1.P K1.P@ K2.P K2.P@
OSC1: PROGRAM.1 U$4.9 U$5.3
PGEC1: PROGRAM.2 U$4.5
PGED1: PROGRAM.3 U$4.4
RA0: U$4.2 U$9.1
RA1: U$4.3 U$9.2
RA3: U$4.10 U$9.3
RA4: U$4.12 U$9.4
RB2: R49.2 S2.3 S2.4 U$4.6
RB3: R48.1 S1.3 S1.4 U$4.7
RB4: T2.1 U$4.11
RB5: T1.1 U$4.14
RB6: U$3.13 U$4.15
RB7: U$3.12 U$4.16
RB8: U$3.11 U$4.17
RB9: U$3.10 U$4.18
RB10: U$4.21 U$6.5
RB11: U$4.22 U$6.4
RB12: U$4.23 U$6.3
RB13: U$4.24 U$6.2
RB14: U$4.25 U$6.1
RB15: U$4.26